# EAGLE board RFID_reader_v2 (EAGLE 9.0.1)
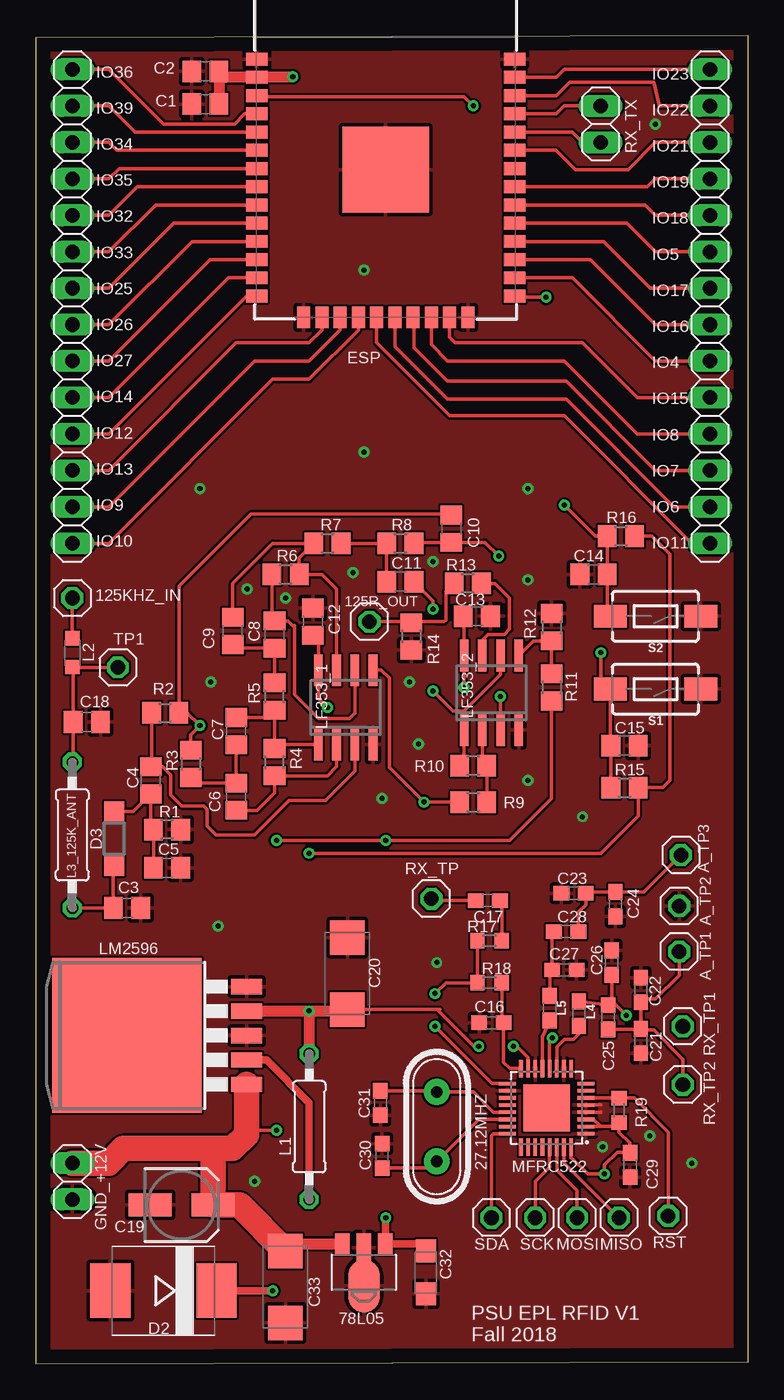
[diagram p0: board, top side]
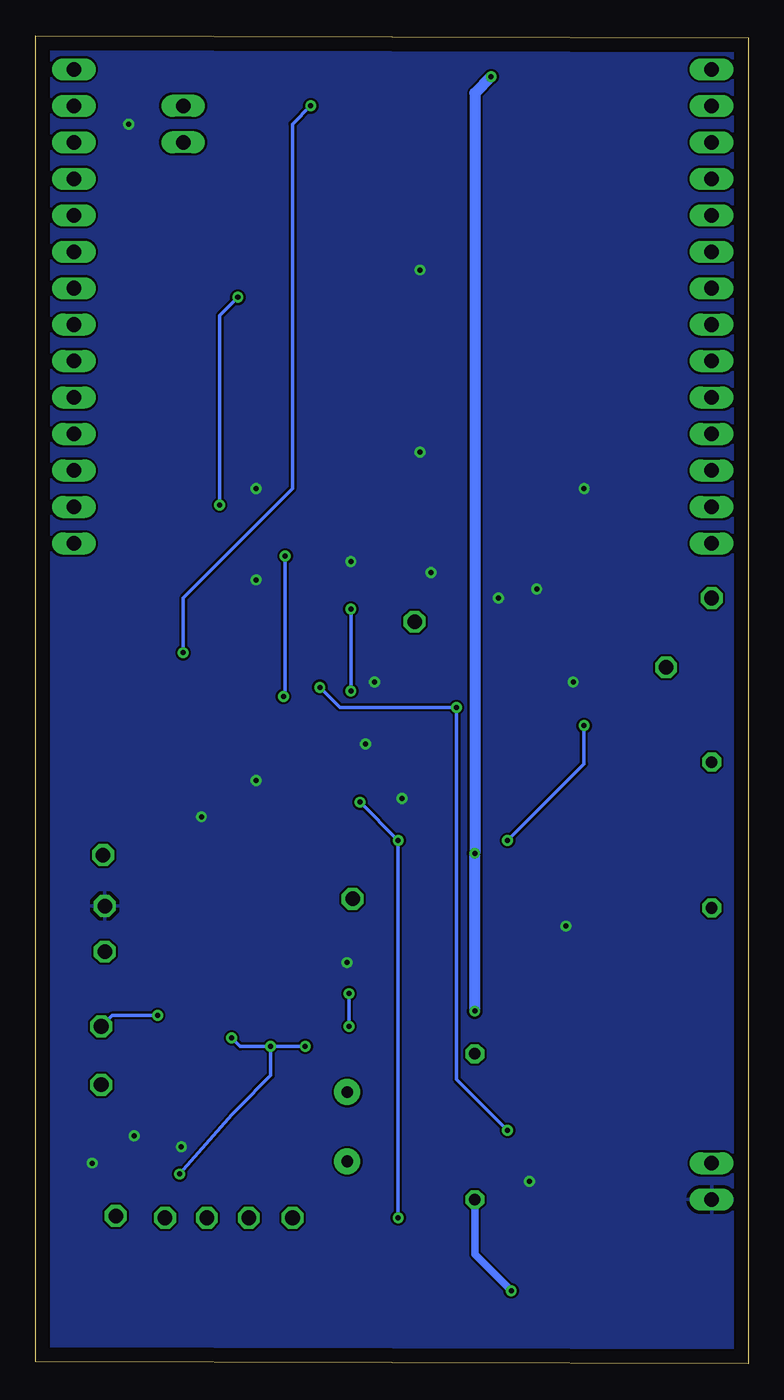
[diagram p1: board, bottom side, seen from below]

Size 49.64 x 92.51 mm. Coordinates in mm from the lower left corner, seen from the top.
Outline: 0,0 49.64,0.13 49.64,92.51 0,92.38 0,0
Copper layers (1*16): Top 0.035mm / dielectric 1.5mm / Bottom 0.035mm
Design rules "default": minimum track width 6mil, minimum drill 0.35mm, track to track 6mil, track to pad 6mil, pad to pad 6mil, via to via 6mil, smd to smd 6mil, copper to edge 40mil, drill to drill 6mil, minimum pad ring 10mil, minimum via ring 8mil, stop-mask expansion 4mil, vias tented up to drill 0mil, thermal gap 10mil

## Footprints (pad centres in the part's own frame; a part is rotated, then mirrored left to right if it is on the bottom)
HC49 = drill 0.813 pad 1.8: 1 -2.413,0; 2 2.413,0
SOT89 = smd 1 x 1.5: 1 -1.499,-1.981; 3 1.499,-1.981 | smd 1 x 2: 2 0,-1.727 | smd 2.2 x 3.7: 2@1 0,0.94
1X01 = drill 1.016 octagon: 1 0,0
C0805 = smd 1.3 x 1.5: 1 -0.95,0; 2 0.95,0
C0603 = smd 1.1 x 1: 1 -0.85,0; 2 0.85,0
SANYO-OSCON_SMD_B6 = smd 3 x 1.6: + 2.2,0; - -2.2,0
SMC_C = smd 2.4 x 2.4: + -2.5,0; - 2.5,0
SMC_A = smd 1.6 x 1.4: + -1.5,0; - 1.5,0
SMC = smd 2.8 x 3.8: A 3.7,0; C -3.7,0
SOD123 = smd 1.4 x 1.4: A 1.9,0; C -1.9,0
ESP-WROOM-32 = smd 0.9 x 1.5: 1 7.7,9; 2 6.43,9; 3 5.16,9; 4 3.89,9; 5 2.62,9; 6 1.35,9; 7 0.08,9; 8 -1.19,9; 9 -2.46,9; 10 -3.73,9; 11 -5,9; 12 -6.27,9; 13 -7.54,9; 14 -8.81,9; 25 -8.81,-9; 26 -7.54,-9; 27 -6.27,-9; 28 -5,-9; 29 -3.73,-9; 30 -2.46,-9; 31 -1.19,-9; 32 0.08,-9; 33 1.35,-9; 34 2.62,-9; 35 3.89,-9; 36 5.16,-9; 37 6.43,-9; 38 7.7,-9 | smd 1.5 x 0.9: 15 -10.3,5.715; 16 -10.3,4.445; 17 -10.3,3.175; 18 -10.3,1.905; 19 -10.3,0.635; 20 -10.3,-0.635; 21 -10.3,-1.905; 22 -10.3,-3.175; 23 -10.3,-4.445; 24 -10.3,-5.715 | smd 6 x 6: GND 0,0
1X02 = drill 1.016 long: 1 -1.27,0; 2 1.27,0
1X14 = drill 1.016 long: 1 -16.51,0; 2 -13.97,0; 3 -11.43,0; 4 -8.89,0; 5 -6.35,0; 6 -3.81,0; 7 -1.27,0; 8 1.27,0; 9 3.81,0; 10 6.35,0; 11 8.89,0; 12 11.43,0; 13 13.97,0; 14 16.51,0
0207/10 = drill 0.813 octagon: 1 -5.08,0; 2 5.08,0
L2012C = smd 1 x 1: 1 -1,0; 2 1,0
0603 = smd 1.1 x 1: 1 -0.85,0; 2 0.85,0
SO08 = smd 0.6 x 2.2: 1 -1.905,-2.6; 2 -0.635,-2.6; 3 0.635,-2.6; 4 1.905,-2.6; 5 1.905,2.6; 6 0.635,2.6; 7 -0.635,2.6; 8 -1.905,2.6
TO263-5 = smd 1.067 x 2.159: 1 -3.404,-5.791; 2 -1.702,-5.791; 3 0,-5.791; 4 1.702,-5.791; 5 3.404,-5.791 | smd 10.8 x 10.41: 6 0,2.54
MFR522 = smd 1.2 x 0.254: 1 -0.236,4.3; 2 -0.236,3.8; 3 -0.236,3.3; 4 -0.236,2.8; 5 -0.236,2.3; 6 -0.236,1.8; 7 -0.236,1.3; 8 -0.236,0.8; 17 5.237,0.8; 18 5.237,1.3; 19 5.237,1.8; 20 5.237,2.3; 21 5.237,2.8; 22 5.237,3.3; 23 5.237,3.8; 24 5.237,4.3 | smd 0.254 x 1.2: 9 0.8,-0.236; 10 1.3,-0.236; 11 1.8,-0.236; 12 2.3,-0.236; 13 2.8,-0.236; 14 3.3,-0.236; 15 3.8,-0.236; 16 4.3,-0.236; 25 4.3,5.237; 26 3.8,5.237; 27 3.3,5.237; 28 2.8,5.237; 29 2.3,5.237; 30 1.8,5.237; 31 1.3,5.237; 32 0.8,5.237 | smd 3.25 x 3.25: P$1 2.5,2.5
R0805 = smd 1.3 x 1.5: 1 -0.95,0; 2 0.95,0
R0603 = smd 1 x 1.1: 1 -0.85,0; 2 0.85,0
TACTILE_SWITCH_SMD_6.0X3.5MM = smd 2.3 x 1.6: 1 -3.15,0; 2 3.15,0

## Placement (x,y rotation side)
27.12MHZ  CRYSTALS-NOGND-HC49/4H  [HC49]  27.94,16.51 270 top
78L05  78L05F  [SOT89]  22.86,6.35 180 top
125KHZ_IN  [1X01]  2.54,53.34 0 top
125R_OUT  [1X01]  23.24,51.69 270 top
A_TP1  [1X01]  44.83,28.7 270 top
A_TP2  [1X01]  44.83,31.88 270 top
A_TP3  [1X01]  44.96,35.43 270 top
C1  10u  [C0805]  11.81,87.76 180 top
C2  100n  [C0805]  11.81,90.04 180 top
C3  1n  [C0805]  6.35,31.75 0 top
C4  1n  [C0805]  8,40.64 270 top
C5  2.2n  [C0805]  9.14,34.54 0 top
C6  1n  [C0805]  13.97,39.5 270 top
C7  1n  [C0805]  13.97,44.07 90 top
C8  1n  [C0805]  16.64,50.8 90 top
C9  1n  [C0805]  13.72,51.05 90 top
C10  1n  [C0805]  28.96,58.17 270 top
C11  1n  [C0805]  25.4,54.48 0 top
C12  100n  [C0805]  19.3,51.69 90 top
C13  100n  [C0805]  30.73,52.07 0 top
C14  1n  [C0805]  38.86,54.99 0 top
C15  1n  [C0805]  41.02,43.05 180 top
C16  100n  [C0603]  31.75,23.75 180 top
C17  100n  [C0603]  31.5,32.26 0 top
C18  100n  [C0805]  3.56,44.7 0 top
C19  22u  [SANYO-OSCON_SMD_B6]  10.16,11.05 0 top
C20  4.7u  [SMC_C]  21.72,27.18 90 top
C21  180p  [C0603]  42.16,22.48 270 top
C22  10p  [C0603]  42.16,26.04 90 top
C23  180p  [C0603]  37.46,32.77 0 top
C24  10p  [C0603]  40.39,32 90 top
C25  15p  [C0603]  39.88,24.13 270 top
C26  47p  [C0603]  40.13,27.94 90 top
C27  47p  [C0603]  36.83,27.43 180 top
C28  15p  [C0603]  36.96,30.1 0 top
C29  100n  [C0603]  41.4,13.84 270 top
C30  15p  [C0603]  24.13,14.48 90 top
C31  15p  [C0603]  24,18.16 270 top
C32  1u  [SMC_A]  27.18,6.35 270 top
C33  10u  [SMC_C]  17.4,5.33 270 top
D2  950mV_10A  [SMC]  8.89,5.08 180 top
D3  [SOD123]  5.46,36.58 270 top
ESP  ESP-WROOM-32  [ESP-WROOM-32]  24.38,83.19 90 top
GND_+12V  [1X02]  2.54,12.7 90 top
JP1  [1X14]  46.99,73.66 90 top
JP2  [1X14]  2.54,73.66 90 top
L1  33u  [0207/10]  19.05,16.51 90 top
L2  15u  [L2012C]  2.54,49.53 90 top
L3_125K_ANT  1.62mH  [0207/10]  2.54,36.83 90 top
L4  2.2u  [0603]  37.85,24.38 90 top
L5  2.2u  [0603]  35.81,24.76 90 top
LF353_1  LF353D  [SO08]  21.59,45.72 0 top
LF353_2  LF353D  [SO08]  31.75,46.74 0 top
LM2596  LM2596S  [TO263-5]  8.89,22.86 90 top
MFRC522  MFRC522  [MFR522]  38.1,20.32 180 top
MISO  [1X01]  40.64,10.16 270 top
MOSI  [1X01]  37.72,10.16 270 top
R1  860k  [R0805]  9.14,37.21 180 top
R2  1 Meg  [R0805]  9.02,45.34 0 top
R3  1.8k  [R0805]  10.79,41.78 270 top
R4  47k  [R0805]  16.64,41.91 90 top
R5  2.7k  [R0805]  16.64,46.48 90 top
R6  82k  [R0805]  17.4,54.99 0 top
R7  10k  [R0805]  20.32,57.15 0 top
R8  10k  [R0805]  25.4,57.15 0 top
R9  10k  [R0805]  30.48,39.12 0 top
R10  15k  [R0805]  30.48,41.66 180 top
R11  100  [R0805]  35.94,47.12 270 top
R12  10k  [R0805]  35.94,51.31 270 top
R13  1k  [R0805]  30.1,54.36 180 top
R14  1k  [R0805]  26.16,50.67 270 top
R15  10k  [R0805]  41.02,40.13 0 top
R16  10k  [R0805]  40.77,57.66 0 top
R17  5100  [R0603]  31.62,29.46 180 top
R18  820  [R0603]  31.62,26.54 180 top
R19  10k  [R0603]  40.64,17.65 270 top
RST  [1X01]  44.07,10.29 270 top
RX_TP  [1X01]  27.56,32.39 270 top
RX_TP1  [1X01]  45.09,23.49 270 top
RX_TP2  [1X01]  45.09,19.43 270 top
RX_TX  [1X02]  39.37,86.36 270 top
S1  SW1  [TACTILE_SWITCH_SMD_6.0X3.5MM]  43.18,46.99 180 top
S2  SW2  [TACTILE_SWITCH_SMD_6.0X3.5MM]  43.18,52.07 180 top
SCK  [1X01]  34.8,10.16 270 top
SDA  [1X01]  31.75,10.16 270 top
TP1  [1X01]  5.71,48.51 0 top

## Library data of the parts
27.12MHZ = IQD-Frequency-Products
78L05 LF353_2 = linear
125KHZ_IN 125R_OUT A_TP1-A_TP3 GND_+12V JP1 JP2 MISO MOSI RST RX_TP RX_TP1 RX_TP2 RX_TX SCK SDA TP1 = pinhead
C1-C33 = rcl; SPICEPREFIX: C
D2 = diode
D3 = sym
ESP = SparkFun-RF; PROD_ID: IC-13849
L1 L2 L3_125K_ANT = rcl; SPICEPREFIX: L
L4 L5 = SparkFun-Coils; PROD_ID: NDUC-07874
LF353_1 = linear; SPICEPREFIX: J
LM2596 = national-semiconductor; MF: NATIONAL SEMICONDUCTOR; MPN: LM2596S-ADJ/NOPB; OC_FARNELL: 9494367; OC_NEWARK: 41K3842
MFRC522 = mfrc
R1-R19 = rcl; SPICEPREFIX: R
S1 S2 = SparkFun-Switches; PROD_ID: SWCH-00815; SF_SKU: COM-08229

## Nets
+3V3: C1.1 C2.1 C20.+ C29.1 ESP.2 L1.2 LM2596.4 MFRC522.2 MFRC522.3 MFRC522.12 MFRC522.15 MFRC522.32 R15.2 R16.2 R19.2
+5V: 78L05.1 C10.1 C32.+ LF353_1.5 R2.2 R3.1 R9.1 R11.2
+12V: 78L05.3 C12.1 C13.1 C19.+ C33.+ GND_+12V.2 LF353_1.8 LF353_2.8 LM2596.1
EN: C15.2 ESP.3 R15.1 S1.2
GND: 78L05.2 78L05.2@1 A_TP2.1 C1.2 C2.2 C3.2 C5.2 C12.2 C13.2 C14.1 C15.1 C16.2 C18.2 C19.- C20.- C21.2 C22.2 C23.1 C24.1 C26.2 C27.1 C29.2 C30.2 C31.2 C32.- C33.- D2.A ESP.1 ESP.15 ESP.24 ESP.38 ESP.GND GND_+12V.1 LF353_1.4 LF353_2.4 LM2596.3 LM2596.5 MFRC522.1 MFRC522.4 MFRC522.5 MFRC522.10 MFRC522.14 MFRC522.18 R1.1 R12.1 R14.2 S1.1 S2.1
IO0: C14.2 ESP.25 R16.1 S2.2
IO4: ESP.26 JP1.6
IO5: ESP.29 JP1.9
IO6: ESP.20 JP1.2
IO7: ESP.21 JP1.3
IO8: ESP.22 JP1.4
IO9: ESP.17 JP2.2
IO10: ESP.18 JP2.1
IO11: ESP.19 JP1.1
IO12: ESP.14 JP2.4
IO13: ESP.16 JP2.3
IO14: ESP.13 JP2.5
IO15: ESP.23 JP1.5
IO16: ESP.27 JP1.7
IO17: ESP.28 JP1.8
IO18: ESP.30 JP1.10
IO19: ESP.31 JP1.11
IO21: ESP.33 JP1.12
IO22: ESP.36 JP1.13
IO23: ESP.37 JP1.14
IO25: ESP.10 JP2.8
IO26: ESP.11 JP2.7
IO27: ESP.12 JP2.6
IO32: ESP.8 JP2.10
IO33: ESP.9 JP2.9
IO34: ESP.6 JP2.12
IO35: ESP.7 JP2.11
IO36: ESP.4 JP2.14
IO39: ESP.5 JP2.13
M-MFMISO: MFRC522.31 MISO.1
M-MFMOSI: MFRC522.30 MOSI.1
M-MFRST: MFRC522.6 R19.1 RST.1
M-MFSCK: MFRC522.29 SCK.1
M-MFSDA: MFRC522.24 SDA.1
N$1: C4.2 C5.1 D3.C R1.2
N$2: C4.1 LF353_1.3 R2.1
N$3: D2.C L1.1 LM2596.2
N$4: C3.1 D3.A L3_125K_ANT.1
N$5: 125KHZ_IN.1 L2.2
N$6: C6.1 C7.1 R3.2
N$7: C6.2 LF353_1.2 R4.1
N$8: C8.1 C9.1 R5.2
N$9: C7.2 LF353_1.1 R4.2 R5.1
N$10: C8.2 LF353_1.6 R6.1
N$11: C9.2 LF353_1.7 R6.2 R7.1
N$12: C11.1 R7.2 R8.1
N$13: C10.2 LF353_2.3 R8.2
N$14: C17.2 R17.1
N$15: LF353_2.2 R9.2 R10.1
N$16: C11.2 LF353_2.1 LF353_2.6 R10.2
N$17: C18.1 L2.1 L3_125K_ANT.2 TP1.1
N$18: LF353_2.5 R11.1 R12.2
N$19: LF353_2.7 R13.1
N$20: 125R_OUT.1 R13.2 R14.1
N$21: C27.2 C28.1 L5.2
N$22: C25.1 C26.1 L4.2 RX_TP1.1
N$23: C17.1 RX_TP.1
N$24: A_TP1.1 C21.1 C22.1 C25.2 RX_TP2.1
N$25: A_TP3.1 C23.2 C24.2 C28.2
OSCIN: 27.12MHZ.1 C31.1 MFRC522.21
OSCOUT: 27.12MHZ.2 C30.1 MFRC522.22
RX: MFRC522.17 R17.2 R18.2
RXD: ESP.34 RX_TX.2
TX1: L4.1 MFRC522.11
TX2: L5.1 MFRC522.13
TXD: ESP.35 RX_TX.1
VMID: C16.1 MFRC522.16 R18.1

## Tracks (layer width: path | path; a pad name or v marks a point on that pad's centre or on a via)
+3V3  (via drill 0.35)
  Top 0.254: R16.2 42.93,57.66 44.2,56.39 44.2,40.64 43.69,40.13 R15.2 41.97,38.16 39.37,35.56 v19.05,35.56 | MFRC522.2 39.37,16.52 | 39.37,16.52 40.36,16.52 R19.2 40.64,16.13 41.4,15.37 C29.1 41.36,14.73 40.51,14.73 39.62,13.84 v39.62,13.21 38.48,13.21 37.34,14.35 37.3,14.35 MFRC522.32 | MFRC522.3 38.87,17.02 39.37,16.52 | C20.+ 27.94,24.68 | 27.94,24.68 28.15,24.68 | MFRC522.15 34.29,21.34 33.53,22.1 v33.27,22.1 | 27.94,24.68 30.52,22.1 v30.86,22.1 | v35.99,22.69 35.8,22.51 MFRC522.12
  Top 0.762: LM2596.4 v19.05,24.56 | v19.05,24.56 21.6,24.56 C20.+ | v19.05,24.56 L1.2 | C1.1 C2.1 13.19,89.61 ESP.2 15.43,89.66 v17.91,89.66
  Bottom 0.254: v39.62,13.21 35.96,17.38 35.56,17.78 33.27,20.07 v33.27,22.1 | v30.86,22.1 v33.27,22.1 | v33.27,22.1 35.39,22.1 v35.99,22.69
  Bottom 0.762: v19.05,24.56 v19.05,35.56 19.05,88.52 v17.91,89.66
+5V  (via drill 0.35)
  Top 0.254: R3.1 10.79,43.82 v11.43,44.45 10.54,45.34 R2.2 | R2.2 10.16,45.34 | R2.2 9.97,54.16 14.99,59.18 28.89,59.18 C10.1 | LF353_1.5 24.07,48.32 24.64,47.75 24.64,41.53 v27.05,39.12 R9.1 | R11.2 35.94,39.37 33.02,36.45 v24.38,36.45 v16.76,36.45
  Top 0.508: C32.+ 26.7,8.33 78L05.1 24.38,8.36 v24.38,10.16
  Bottom 0.254: v24.38,10.16 v24.38,36.45 v27.05,39.12 | v16.76,36.45 11.43,41.78 v11.43,44.45
+12V  (via drill 0.35)
  Top 0.254: v20.32,45.72 19.68,46.36 LF353_1.8 19.68,50.36 C12.1 | v29.84,47.12 LF353_2.8 29.84,52.01 C13.1 | v16.76,16.26 14.99,16.26 14.68,15.95
  Top 0.762: C33.+ 17.9,8.33 78L05.3
  Top 1.778: LM2596.1 14.68,15.95 13.72,14.99 12.7,14.99 | GND_+12V.2 5.08,13.97 6.1,14.99 12.7,14.99 | 12.7,14.99 12.36,14.65 C19.+ 14.18,11.05 C33.+
  Bottom 0.254: v16.76,16.26 20.32,19.81 v20.32,45.72 28.45,45.72 v29.84,47.12
EN  (via drill 0.35)
  Top 0.254: ESP.3 15.46,88.27 29.84,88.27 v30.48,87.63 | R15.1 C15.2 40.03,43.09 S1.2 39.37,47.65 v39.37,49.53
  Bottom 0.254: v30.48,87.63 31.75,86.36 31.75,60.96 39.37,53.34 v39.37,49.53
GND  (via drill 0.35)
  Top 0.254: MFRC522.4 39.36,17.52 39.37,17.53 | MFRC522.5 39.36,18.02 39.37,18.03
  other vias: 22.86,76.2 22.86,63.5 11.43,60.96 34.29,60.96 43.18,86.36 12.7,30.48 24.13,39.37 26.67,43.18 12.19,47.5 22.1,55.12 14.73,53.98 27.94,27.94 45.72,13.97 15.24,12.7 26.04,47.5 17.4,53.34 27.69,55.88 34.29,54.61 34.29,40.64 38.1,38.1 39.5,15.11 42.8,15.88
  pour Top: 0,92.71 0,0 49.53,0 49.53,92.71
  pour Bottom: 0,92.71 0,0 49.53,0 49.53,92.71
IO0  (via drill 0.35)
  Top 0.254: ESP.25 33.46,74.3 v35.56,74.3 | v36.83,59.82 38.99,57.66 R16.1 C14.2 39.81,52.29 S2.2
  Bottom 0.254: v35.56,74.3 36.83,73.02 v36.83,59.82
IO4
  Top 0.254: ESP.26 37.38,75.64 43.18,69.85 JP1.6
IO5
  Top 0.254: JP1.9 43.18,77.47 41.2,79.45 ESP.29
IO6
  Top 0.254: JP1.2 44.45,59.69 36.96,67.18 28.7,67.18 25.02,70.87 ESP.20
IO7
  Top 0.254: ESP.21 26.35,72.82 26.35,70.8 28.7,68.45 36.96,68.45 43.18,62.23 JP1.3
IO8
  Top 0.254: JP1.4 41.91,64.77 36.83,69.85 28.7,69.85 27.56,70.99 ESP.22
IO9
  Top 0.254: ESP.17 21.21,72.01 19.05,69.85 15.24,69.85 5.08,59.69 JP2.2
IO10
  Top 0.254: JP2.1 5.08,57.15 16.51,68.58 19.05,68.58 22.48,72.01 ESP.18
IO11
  Top 0.254: ESP.19 23.75,71.12 28.83,66.04 36.83,66.04 45.72,57.15 JP1.1
IO12
  Top 0.254: ESP.14 14.68,74.38 5.08,64.77 JP2.4
IO13
  Top 0.254: JP2.3 5.08,62.23 13.97,71.12 19.05,71.12 19.94,72.01 ESP.16
IO14
  Top 0.254: JP2.5 5.08,67.31 13.41,75.64 ESP.13
IO15
  Top 0.254: ESP.23 28.83,71.5 29.21,71.12 38.1,71.12 41.91,67.31 JP1.5
IO16
  Top 0.254: ESP.27 38.65,76.91 43.18,72.39 JP1.7
IO17
  Top 0.254: ESP.28 39.58,78.19 42.84,74.93 JP1.8
IO18
  Top 0.254: ESP.30 42.46,80.72 43.18,80.01 JP1.10
IO19
  Top 0.254: ESP.31 42.62,81.99 43.18,82.55 JP1.11
IO21
  Top 0.254: ESP.33 36.24,84.53 37.59,83.19 41.27,83.19 43.18,85.09 JP1.12
IO22
  Top 0.254: ESP.36 36.27,88.34 37.21,89.28 43.05,89.28 43.43,87.63 JP1.13
IO23
  Top 0.254: ESP.37 36.27,89.61 36.83,90.17 JP1.14
IO25
  Top 0.254: ESP.10 9.6,79.45 5.08,74.93 JP2.8
IO26
  Top 0.254: JP2.7 5.08,72.39 10.87,78.19 ESP.11
IO27
  Top 0.254: ESP.12 12.15,76.91 5.08,69.85 JP2.6
IO32
  Top 0.254: ESP.8 7.06,81.99 5.08,80.01 JP2.10
IO33
  Top 0.254: JP2.9 5.08,77.47 8.34,80.72 ESP.9
IO34
  Top 0.254: ESP.6 5.63,84.53 5.08,85.09 JP2.12
IO35
  Top 0.254: JP2.11 5.08,82.55 5.79,83.27 ESP.7
IO36
  Top 0.254: JP2.14 5.08,90.17 8.89,86.36 13.84,86.36 14.56,87.07 15.24,87.07 | 15.22,87.06 15.24,87.07 | ESP.4 15.24,87.07
IO39
  Top 0.254: ESP.5 6.9,85.8 5.08,87.63 JP2.13
M-MFMISO
  Top 0.254: MISO.1 36.8,14 MFRC522.31
M-MFMOSI
  Top 0.254: MFRC522.30 36.3,13.48 37.72,12.06 MOSI.1
M-MFRST
  Top 0.254: MFRC522.6 40.62,18.52 R19.1 41.7,18.5 44.07,16.13 RST.1
M-MFSCK
  Top 0.254: SCK.1 34.8,12.7 35.81,13.72 35.8,13.73 MFRC522.29
M-MFSDA
  Top 0.254: MFRC522.24 31.9,16.02 31.75,15.88 SDA.1
N$1
  Top 0.254: D3.C 6.79,38.48 C4.2 8,37.4 R1.2 C5.1
N$2
  Top 0.254: LF353_1.3 22.23,41.28 20.19,39.24 17.65,39.24 15.24,36.83 12.57,36.83 11.94,37.47 11.94,38.61 11.68,38.86 10.16,38.86 9.4,39.62 9.4,41.02 8.83,41.59 C4.1 8.07,41.66 R2.1
N$3  (via drill 0.35)
  Top 0.508: LM2596.2 14.69,21.14 16.06,21.14 19.05,18.16 L1.1 | v16.51,5.08 D2.C
  Bottom 0.508: L1.1 19.05,7.62 v16.51,5.08
N$4
  Top 0.254: L3_125K_ANT.1 C3.1 5.4,34.62 D3.A
N$5
  Top 0.254: 125KHZ_IN.1 L2.2
N$6
  Top 0.254: R3.2 11.18,40.45 C6.1 C7.1
N$7
  Top 0.254: C6.2 15.43,38.55 16.64,39.75 R4.1 20.32,40.96 20.95,41.6 LF353_1.2
N$8
  Top 0.254: C9.1 13.97,49.85 C8.1 R5.2
N$9
  Top 0.254: C7.2 16.12,45.02 R5.1 R4.2 16.9,43.12 LF353_1.1
N$10
  Top 0.254: R6.1 16.45,51.94 C8.2 | C8.2 16.7,51.82 | LF353_1.6 22.23,45.34 21.84,44.96 19.68,44.96 18.03,46.61 18.03,51.44 17.9,51.44 17.59,51.75 C8.2
N$11
  Top 0.254: C9.2 13.72,54.36 16.51,57.15 R7.1 18.35,56.13 R6.2 19.94,54.99 20.95,53.98 LF353_1.7
N$12
  Top 0.254: C11.1 R8.1 R7.2
N$13  (via drill 0.35)
  Top 0.254: v32.38,46.48 LF353_2.3 | R8.2 26.42,57.22 C10.2 31.3,57.22 v32.26,56.26
  Bottom 0.254: v32.26,56.26 32.26,46.61 v32.38,46.48
N$14
  Top 0.254: C17.2 32.47,32.13 R17.1
N$15
  Top 0.254: R9.2 R10.1 31.12,41.97 LF353_2.2
N$16  (via drill 0.35)
  Top 0.254: R10.2 29.84,41.97 LF353_2.1 29.84,45.47 | 29.84,45.47 29.08,45.47 v27.69,46.86 | 29.84,45.47 32.38,48.01 LF353_2.6 | C11.2 27.69,53.15 v27.69,52.58
  Bottom 0.254: v27.69,52.58 v27.69,46.86
N$17
  Top 0.254: TP1.1 2.56,48.51 L2.1 2.61,48.46 C18.1 2.61,41.98 L3_125K_ANT.2
N$18
  Top 0.254: LF353_2.5 34.68,50.36 R12.2 R11.1
N$19
  Top 0.254: LF353_2.7 31.12,50.42 31.5,50.8 32.64,50.8 33.02,51.18 33.02,53.34 32,54.36 R13.1
N$20
  Top 0.254: R13.2 28.57,53.78 28.57,51.82 28.45,51.69 27.94,51.69 26.1,51.69 | R14.1 26.1,51.69 | 26.1,51.69 125R_OUT.1
N$21
  Top 0.254: L5.2 35.81,27.27 C27.2 35.98,29.97 C28.1
N$22  (via drill 0.35)
  Top 0.254: L4.2 C25.1 | C25.1 40.13,25.23 C26.1 | C25.1 40.43,24.98 v41.15,24.26
  Bottom 0.254: v41.15,24.26 44.32,24.26 RX_TP1.1
N$23
  Top 0.254: C17.1 27.69,32.26 RX_TP.1
N$24
  Top 0.254: A_TP1.1 44.83,27.05 43.18,25.4 42.38,25.4 C22.1 C21.1 | C21.1 42.12,23.28 C25.2 | C21.1 42.25,23.24 43.05,23.24 45.09,21.21 RX_TP2.1
N$25
  Top 0.254: A_TP3.1 42.38,32.85 C24.2 38.4,32.85 C23.2 38.31,31.96 37.81,31.46 C28.2
OSCIN
  Top 0.254: C31.1 27.85,19.01 27.12MHZ.1 30.48,18.92 31.88,17.52 MFRC522.21
OSCOUT
  Top 0.254: MFRC522.22 30.86,17.02 27.12MHZ.2 27.47,13.63 C30.1
RX  (via drill 0.35)
  Top 0.254: MFRC522.17 31.79,19.52 v27.81,23.49 | v27.81,25.78 28.57,26.54 R18.2 R17.2
  Bottom 0.254: v27.81,23.49 v27.81,25.78
RXD
  Top 0.254: ESP.34 37.38,85.8 38.1,85.09 RX_TX.2
TX1
  Top 0.254: L4.1 37.85,22.99 37.46,22.61 36.83,22.61 36.3,22.08 MFRC522.11
TX2
  Top 0.254: L5.1 35.3,22.77 MFRC522.13
TXD
  Top 0.254: RX_TX.1 36.83,87.63 36.27,87.07 ESP.35
VMID
  Top 0.254: R18.1 32.47,23.88 C16.1 32.6,20.99 33.04,20.56 MFRC522.16

## Text on the board
tNames: IO36 / / IO39 / / IO34 / / IO35 / / IO32 / / IO33 / / IO25 / / IO26 / / IO27 / / IO14 / / IO12 / / IO13 / / IO9 / / IO10 | IO23 / / IO22 / / IO21 / / IO19 / / IO18 / / IO5 / / IO17 / / IO16 / / IO4 / / IO15 / / IO8 / / IO7 / / IO6 / / IO11 | PSU EPL RFID V1 / Fall 2018